# EAGLE board usb_adapter_panelize (EAGLE 6.5.0)
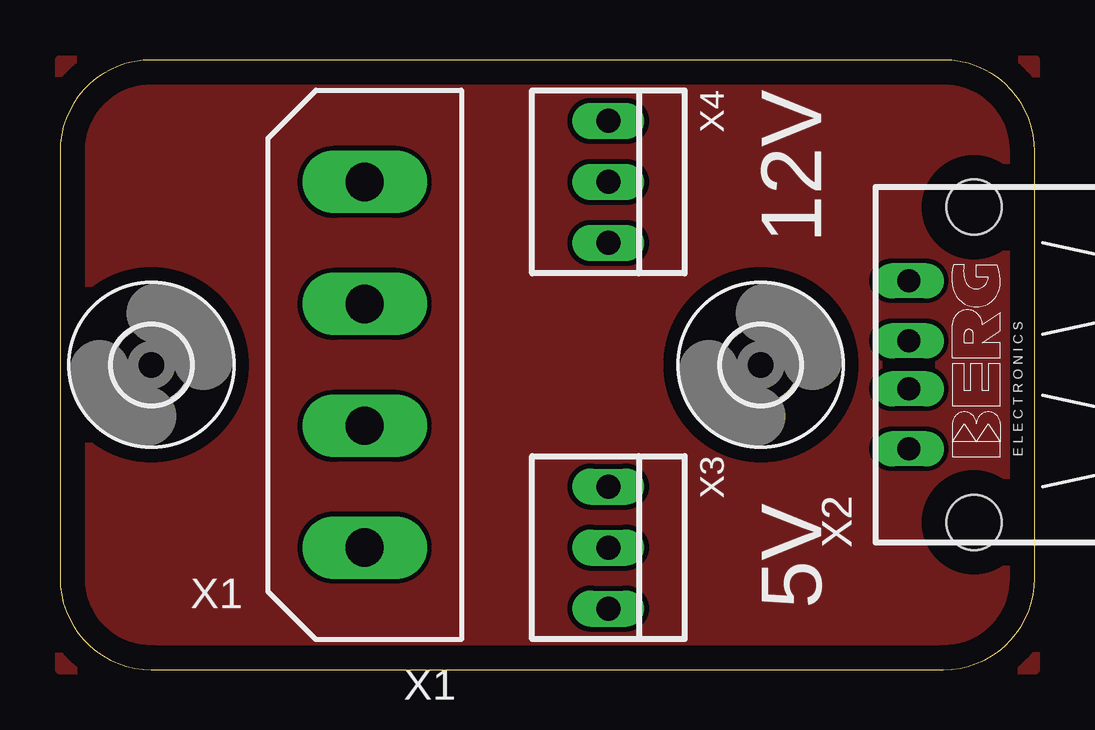
[diagram p0: board, top side]
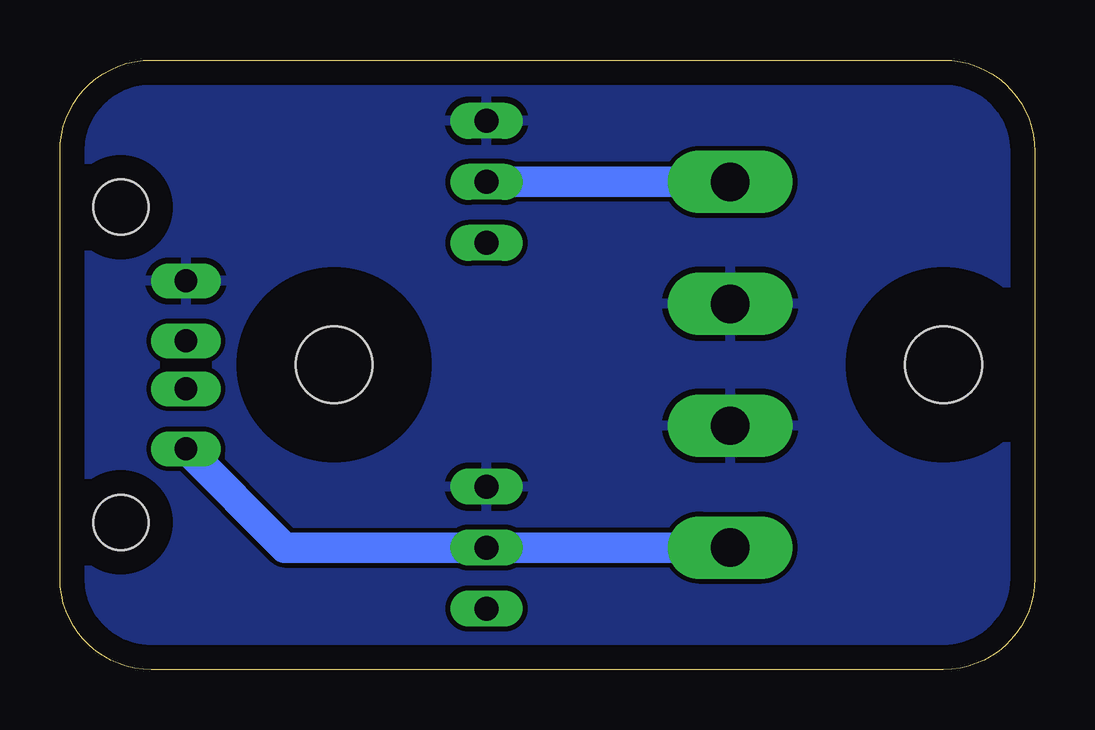
[diagram p1: board, bottom side, seen from below]

Size 40.64 x 25.4 mm. Coordinates in mm from the lower left corner, seen from the top.
Outline: 0,21.59 0,3.81 arc90 3.81,0 36.83,0 arc90 40.64,3.81 40.64,21.59 arc90 36.83,25.4 3.81,25.4 arc90 0,21.59
Copper layers (1*16): Top 0.035mm / dielectric 1.5mm / Bottom 0.035mm
Design rules "default": minimum track width 10mil, minimum drill 24mil, track to track 8mil, track to pad 8mil, pad to pad 8mil, via to via 8mil, smd to smd 8mil, copper to edge 40mil, drill to drill 8mil, minimum pad ring 10mil, minimum via ring 8mil, stop-mask expansion 4mil, vias tented up to drill 0mil, thermal gap 10mil

## Footprints (pad centres in the part's own frame; a part is rotated, then mirrored left to right if it is on the bottom)
3,2 = hole 3.2: 0,0
9090-4V = drill 1.6 pad 2.6 long: 1 -7.62,0; 2 -2.54,0; 3 2.54,0; 4 7.62,0
PN87520 = drill 0.95 long: 1 -3.5,2.71; 2 -1,2.71; 3 1,2.71; 4 3.5,2.71 | hole 2.3: -6.57,0; 6.57,0
22-23-2031 = drill 1 long: 1 -2.54,0; 2 0,0; 3 2.54,0

## Placement (x,y rotation side)
H1  MOUNT-HOLE3.2  [3,2]  3.81,12.7 0 top
H2  MOUNT-HOLE3.2  [3,2]  29.21,12.7 0 top
X1  9090-4V  [9090-4V]  12.7,12.7 90 top
X2  [PN87520]  38.1,12.7 90 top
X3  22-23-2031  [22-23-2031]  22.86,5.08 270 top
X4  22-23-2031  [22-23-2031]  22.86,20.32 270 top

## Library data of the parts
H1 H2 = holes
X1 = con-thomas-betts; OC_FARNELL: unknown; OC_NEWARK: unknown
X2 = con-berg; OC_FARNELL: unknown; OC_NEWARK: unknown
X3 X4 = con-molex; MF: MOLEX; MPN: 22-23-2031; OC_FARNELL: 1462950; OC_NEWARK: 30C0862

## Nets
+5V: X1.1 X2.1 X3.2
+12V: X1.4 X4.2
GND: X1.2 X1.3 X2.4 X3.1 X4.1

## Tracks (layer width: path | path; a pad name or v marks a point on that pad's centre or on a via)
+5V
  Bottom 1.27: X1.1 X3.2 31.27,5.08 X2.1
+12V
  Bottom 1.27: X1.4 X4.2
GND
  pour Bottom: 0,25.4 40.64,25.4 40.64,0 0,0
N$1
  pour Top: 0,25.4 40.64,25.4 40.64,0 0,0

## Text on the board
tNames: 12V | 5V
_tNames: X4 | X3 | X2 | X1